# Altium PCB FR4_Wilkinson_Divider.PcbDoc
Units mm, origin at the board's own origin, x right, y up, seen from the top; angles counter-clockwise.
Board outline 70 x 36 mm, 2 copper layers (Top Layer, Bottom Layer); 8 components, 3 nets, 34 pads, 36 vias.
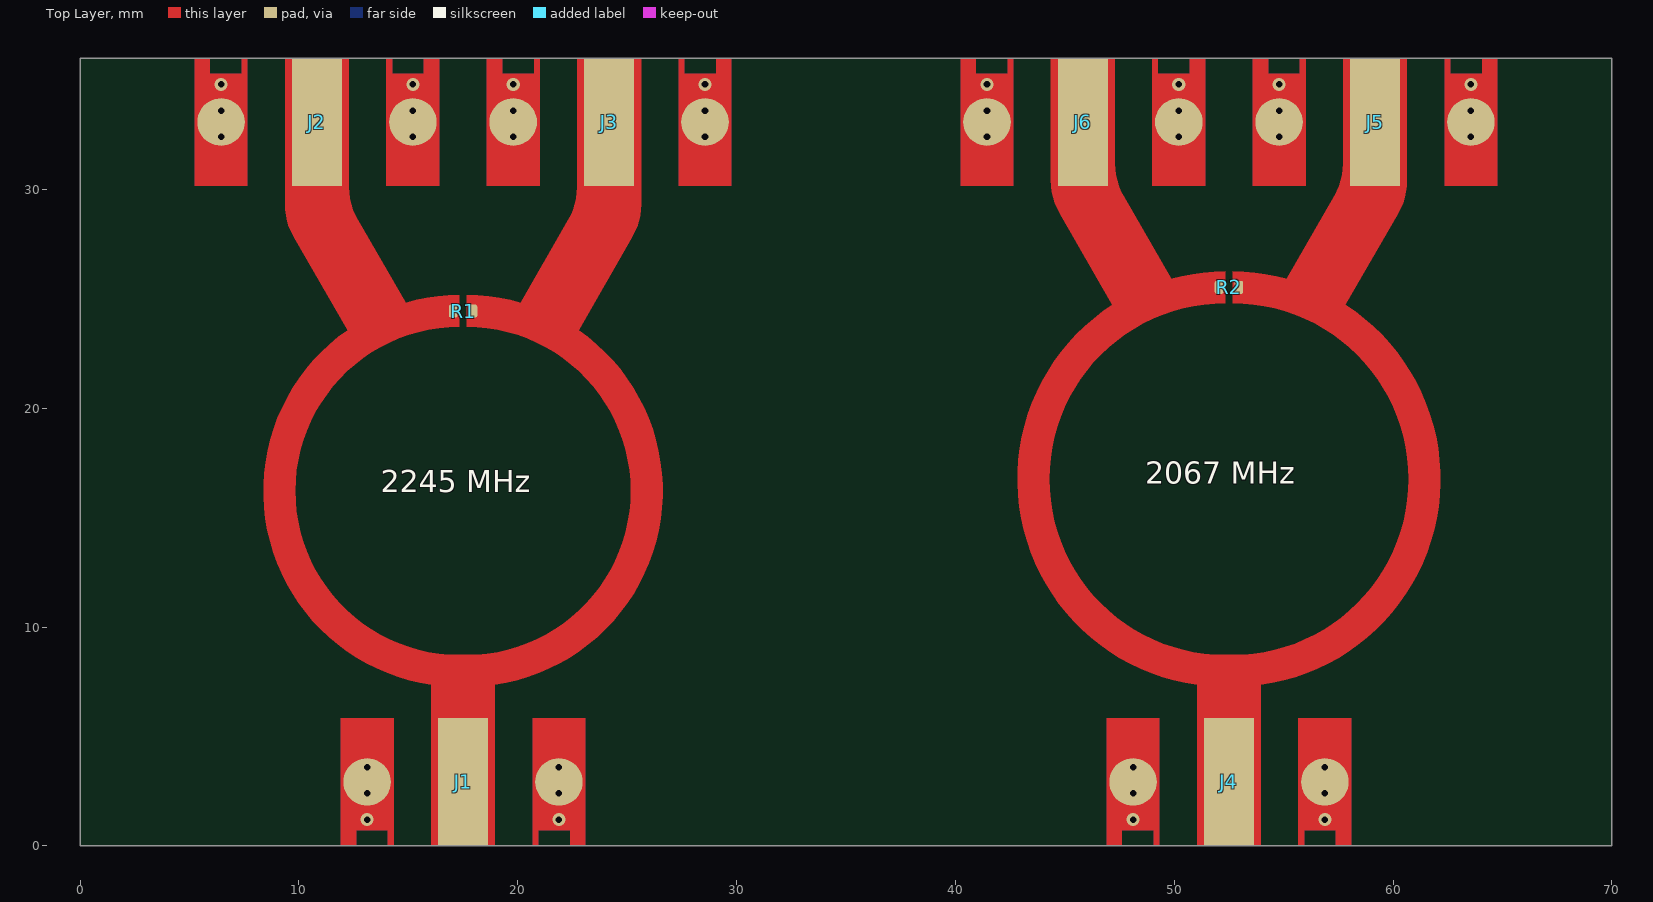
[diagram p0: Top Layer view]
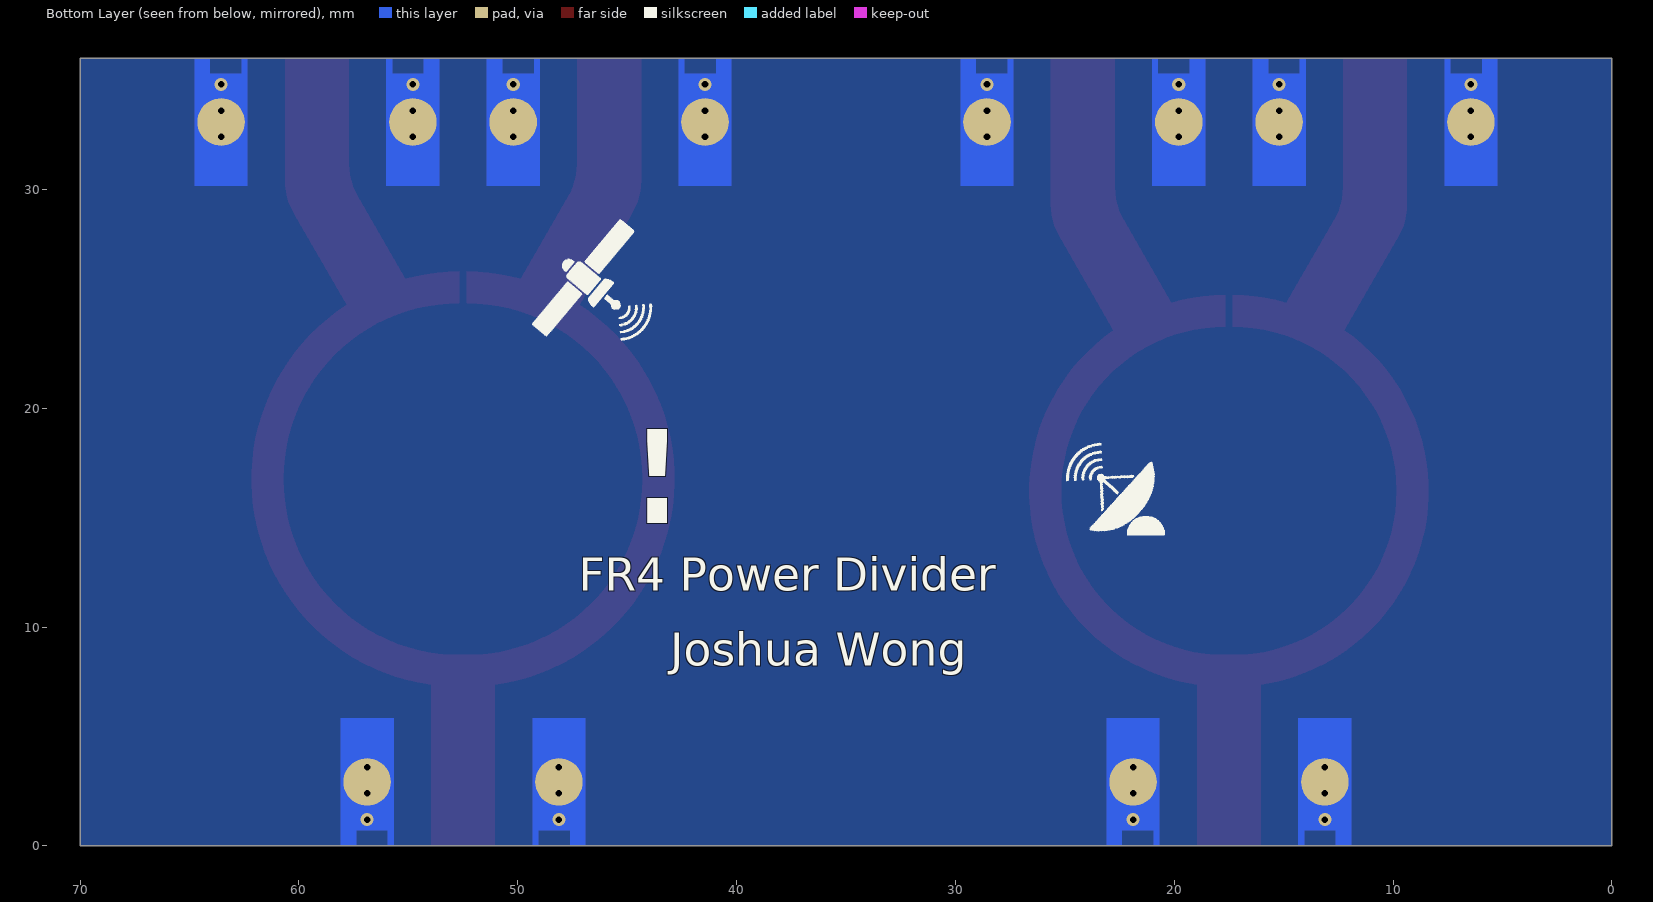
[diagram p1: Bottom Layer view, seen from below]
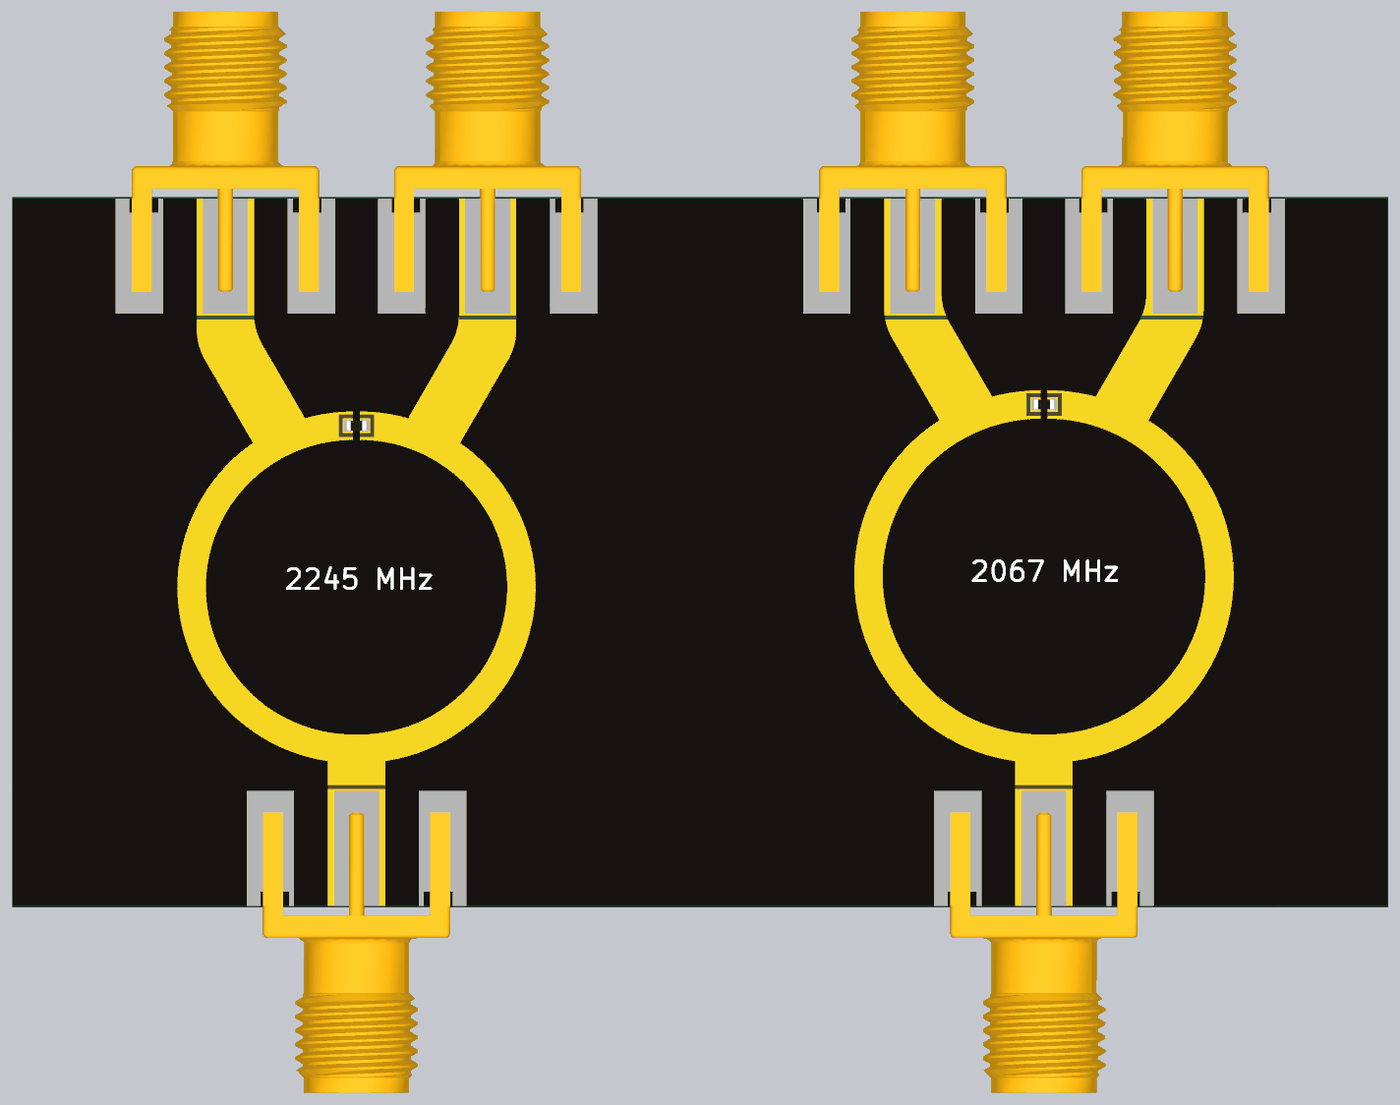
[diagram p2: 3D render of the assembled board from above, using the file's embedded part models]

## Layer stack, top to bottom
Top Solder: solder mask 0.0102, Solder Resist, Dk 3.5
Top Layer: signal copper 0.0356
Dielectric 1: dielectric 0.32, FR-4, Dk 4.8
Bottom Layer: signal copper 0.0356
Bottom Solder: solder mask 0.0102, Solder Resist, Dk 3.5

## Board outline
0,0 0,36 70,36 70,0

## Design rules (kind name [scope] priority, off if disabled: settings)
Clearance [All] p1: gap=0.254 ignorepadtopadclearanceinfootprint=FALSE
PolygonConnect [All] p1: connectstyle=Direct reliefconductorwidth=0.254 reliefentries=4 polygonreliefangle="90 Angle" airgapwidth=0.254
RoutingVias [All] p1: holewidth=0.711 width=1.27 viastyle="Through Hole" minholewidth=0.711 minwidth=1.27 maxholewidth=0.711 maxwidth=1.27
SolderMaskExpansion [All] p1: expansion=0 istentingtop=FALSE
SupplyNets "Schematic Supply Nets" [InNet('GND')] p1: voltage=0.000
Width [All] p1: maxlimit=0.254 minlimit=0.254 preferedwidth=0.254
30 further rules are at their usual default settings.

## Classes and differential pairs
component class FR4_Wilkinson_Divider: J1 J2 J4 J5 J6 R2

## Components (designator, comment, footprint, x,y, rotation, side; value= is the part's Value field where it differs from the comment)
J1 "0732511150" FP-0732511150-MFG 17.5,-2.388 r90 top
J2 "0732511150" FP-0732511150-MFG 10.825,38.388 r270 top
J3 "0732511150" FP-0732511150-MFG 24.175,38.388 r270 top
J4 "0732511150" FP-0732511150-MFG 52.5,-2.388 r90 top
J5 "0732511150" FP-0732511150-MFG 59.175,38.388 r270 top
J6 "0732511150" FP-0732511150-MFG 45.825,38.388 r270 top
R1 "CRCW0402100RFKEE" RES0402R 17.5,24.441 r0 top value=100
R2 "CRCW0402100RFKEE" RES0402R 52.5,25.523 r0 top value=100

## Footprints (in the part's own frame and the unit in brackets; to place one, negate y for a bottom-side part, rotate by r counter-clockwise, add the part's x,y. Pads: shape width x height; smd on the part's side, far side on the other; paste and mask are expansions set on the pad)
FP-0732511150-MFG [mil]
  rect 229.92x90.16 smd paste+0 mask+0: 1(209,0)
  round 85.57 smd paste+0 mask+0: 2(209,172.54) 3(209,-172.54)
  round 85.57 smd far side paste+0 mask+0: 4(209,172.54) 5(209,-172.54)
  Top Layer region: 94.04,-220.08 323.96,-220.08 323.96,-125 94.04,-125 94.04,-135.04 121.99,-135.04 121.99,-192.52 94.04,-192.52
  Top Layer region: 94.04,220.08 323.96,220.08 323.96,125 94.04,125 94.04,135.04 121.99,135.04 121.99,192.52 94.04,192.52
  Bottom Layer region: 94.04,-220.08 323.96,-220.08 323.96,-125 94.04,-125 94.04,-135.04 121.99,-135.04 121.99,-192.52 94.04,-192.52
  Bottom Layer region: 94.04,220.08 323.96,220.08 323.96,125 94.04,125 94.04,135.04 121.99,135.04 121.99,192.52 94.04,192.52
  body extent -291,-224 328,224, height 10
RES0402R [mm] "resistor 0402 reflow soldering"
  rrect50% 0.4x0.6 smd: 1(-0.45,0) 2(0.45,0)
  body extent -0.5,-0.25 0.5,0.25, height 0.3

## Part data
J1 J2 J3 J4 J5 J6: library part CMP-002-00072-2, "RF SMA Connector, 1 Contact(s), Board Mount, Surface Mount Terminal, Locking", Characteristic Impedance=50R, Connector Type=SMA, Contact Finish - Mating="NOT SPECIFIED", Contact Finish - Termination="Gold (Au) - with Nickel (Ni) barrier", Contact Style=Coax, Mounting Option 1=LOCKING, Mounting Style="RIGHT ANGLE", Mounting Technology=Board, Number of Contacts=1, Number of Ports=1, RoHS Compliant=Yes, Termination=SMD/SMT
R1 R2: library part CMP-054-000003-6, "RES SMD 100 OHM 1% 1/16W 0402", Case/Package="0402 (1005 Metric)", Manufacturer="Vishay Dale", Max Operating Temperature=155°C, Min Operating Temperature=-55°C, Power=62.5mW, Rating=AEC-Q200, Supplier Part Number 1=541-2953-1-ND, Tolerance=1%, ComponentLink1Description=Datasheet, ComponentLink1URL=https://www.vishay.com/docs/20035/dcrcwe3.pdf, Composition="Thick Film", PN=CRCW0402100RFKEE, Supplier 1=Digi-Key

## Via types
v1: diameter 0.6, hole 0.3, Top Layer to Bottom Layer, 36 vias

## Nets (pads, with @x,y where several pads share a name; then routed paths per layer and width w, separated by ;. In a path a pad name is that pad's centre, name@x,y a point inside that pad or via, vN(x,y) a via of type N, cw(c..) or ccw(c..) an arc to the next point about the centre after c; other vN are vias at no path point)
GND: J1.2 J1.3 J1.4 J1.5 J2.2 J2.3 J2.4 J2.5 J3.2 J3.3 J3.4 J3.5 J4.2 J4.3 J4.4 J4.5 J5.2 J5.3 J5.4 J5.5 J6.2 J6.3 J6.4 J6.5
  other v1: 13.118,1.201 21.883,1.201 48.118,1.201 56.883,1.201 13.118,2.401 21.883,2.401 48.118,2.401 56.883,2.401 13.118,3.601 21.883,3.601 48.118,3.601 56.883,3.601 6.443,32.399 15.208,32.399 19.793,32.399 28.558,32.399 41.443,32.399 50.208,32.399 54.793,32.399 63.558,32.399 6.443,33.599 15.208,33.599 19.793,33.599 28.558,33.599 41.443,33.599 50.208,33.599 54.793,33.599 63.558,33.599 6.443,34.799 15.208,34.799 19.793,34.799 28.558,34.799 41.443,34.799 50.208,34.799 54.793,34.799 63.558,34.799
Signal_2067: J4.1 J5.1 J6.1 R2.1 R2.2
Signal_2245: J1.1 J2.1 J3.1 R1.1 R1.2

## Polygon pours and split planes (outlines as drawn)
no net on Top Solder "NONET_L-01_P-001" (solid): 0,0 0,36 70,36 70,0
GND on Bottom Layer "GND_L02_P002" (solid, pour order 2): 0,36 0,0 70,0 70,36

## Other copper
Top Layer:
  region net Signal_2245: 16.04,0 16.04,7.368 cw(c17.325,16.22) 12.224,23.569 9.767,27.824 cw(c12.365,29.324) 9.365,29.324 9.365,36 12.285,36 12.285,30.107 ccw(c15.285,30.107) 12.687,28.607 14.872,24.823 cw(c17.325,16.22) 17.325,25.166 17.325,23.716 ccw(c17.325,16.22) 17.325,8.725 17.675,8.725 ccw(c17.675,16.22) 17.675,23.716 17.675,25.166 cw(c17.675,16.22) 20.128,24.823 22.313,28.607 ccw(c19.715,30.107) 22.715,30.107 22.715,36 25.635,36 25.635,29.324 cw(c22.635,29.324) 25.233,27.824 22.776,23.569 cw(c17.675,16.22) 18.96,7.368 18.96,0
  region net Signal_2067: 51.04,0 51.04,7.362 cw(c52.325,16.761) 47.178,24.73 44.767,28.907 cw(c47.365,30.407) 44.365,30.407 44.365,36 47.285,36 47.285,31.189 ccw(c50.285,31.189) 47.687,29.689 49.862,25.923 cw(c52.325,16.761) 52.325,26.248 52.325,24.798 ccw(c52.325,16.761) 52.325,8.725 52.675,8.725 ccw(c52.675,16.761) 52.675,24.798 52.675,26.248 cw(c52.675,16.761) 55.138,25.923 57.313,29.689 ccw(c54.715,31.189) 57.715,31.189 57.715,36 60.635,36 60.635,30.407 cw(c57.635,30.407) 60.233,28.907 57.822,24.73 cw(c52.675,16.761) 53.96,7.362 53.96,0

## Silkscreen, mask and mechanical layers (free items; w line width, h text height)
Top Overlay:
  text "2067 MHz" at 48.664,16.55 h1
  text "2245 MHz" at 13.739,16.152 h1
Bottom Overlay:
  drawing of 17 lines, arcs and shapes, not listed
  text "FR4 Power Divider" at 47.224,11.658 h1.52
  text "!" at 45.449,11.331 h18
  text "Joshua Wong" at 43.033,8.229 h1.52
Top Solder:
  pour cut-out: 51.8,25.898 52.325,25.898 52.325,26.098 51.6,26.098 51.6,24.948 52.325,24.948 52.325,25.148 51.8,25.148
  pour cut-out: 52.675,25.898 52.675,26.098 53.4,26.098 53.4,24.948 52.675,24.948 52.675,25.148 53.2,25.148 53.2,25.898
  pour cut-out: 16.8,24.816 17.325,24.816 17.325,25.016 16.6,25.016 16.6,23.866 17.325,23.866 17.325,24.066 16.8,24.066
  pour cut-out: 17.675,24.816 17.675,25.016 18.4,25.016 18.4,23.866 17.675,23.866 17.675,24.066 18.2,24.066 18.2,24.816
  pour cut-out: 51.036,6.141 51.036,5.941 53.963,5.941 53.963,6.141
  pour cut-out: 16.041,6.141 16.041,5.941 18.967,5.941 18.967,6.141
  pour cut-out: 9.365,30.044 9.365,29.844 12.291,29.844 12.291,30.044
  pour cut-out: 22.712,30.044 22.712,29.844 25.663,29.844 25.663,30.044
  pour cut-out: 57.406,30.044 57.406,29.844 60.609,29.844 60.609,30.044
  pour cut-out: 44.391,30.044 44.391,29.844 47.594,29.844 47.594,30.044
Mechanical 1:
  the board outline again, w0.254